# Altium PCB ConnectorBoard.PcbDoc
Units mm, origin at the board's own origin, x right, y up, seen from the top; angles counter-clockwise.
Board outline 50 x 20 mm, 2 copper layers (Top, Bottom); 14 components, 16 nets, 57 pads, 1 vias.
Unrouted connection lines stored in the file: 7.
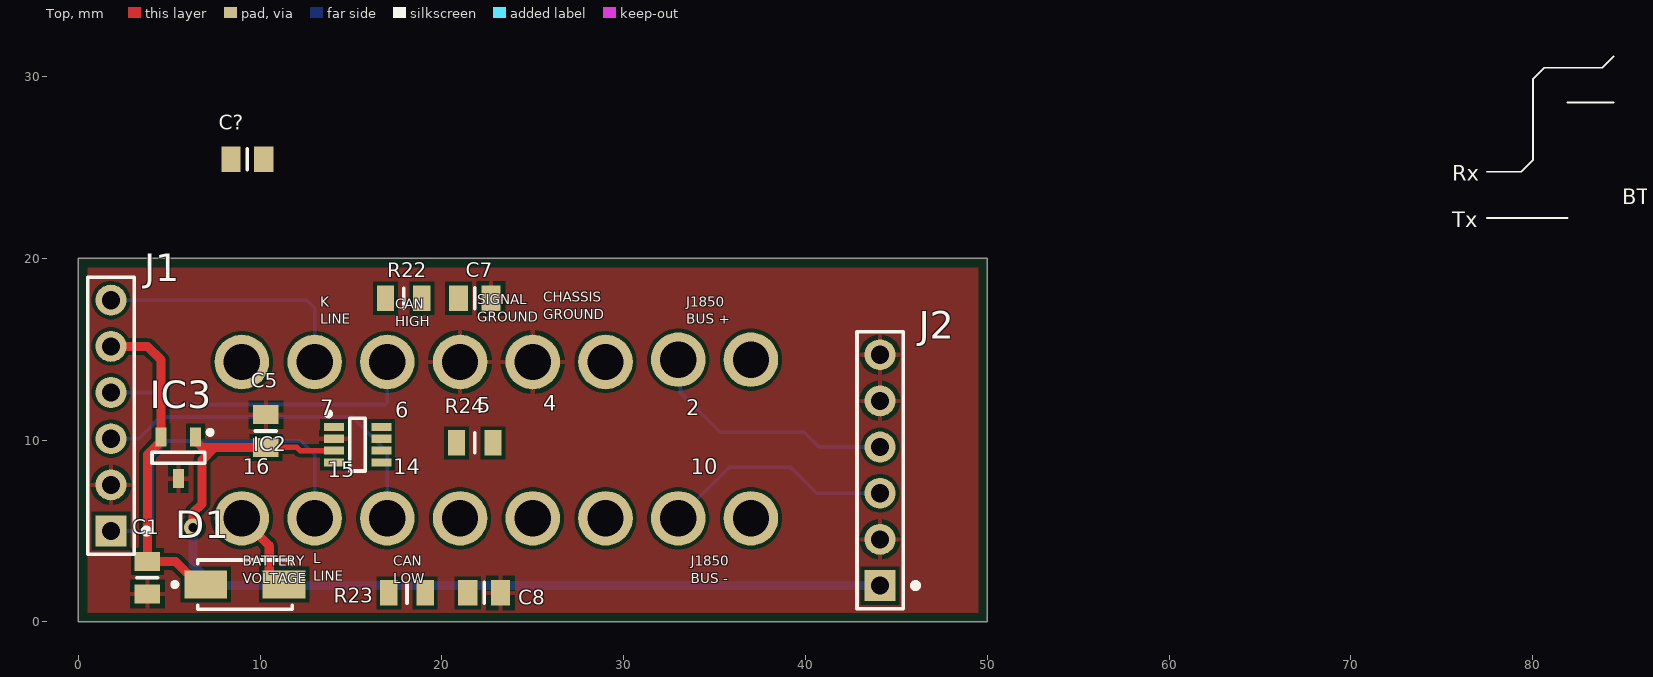
[diagram p0: Top view]
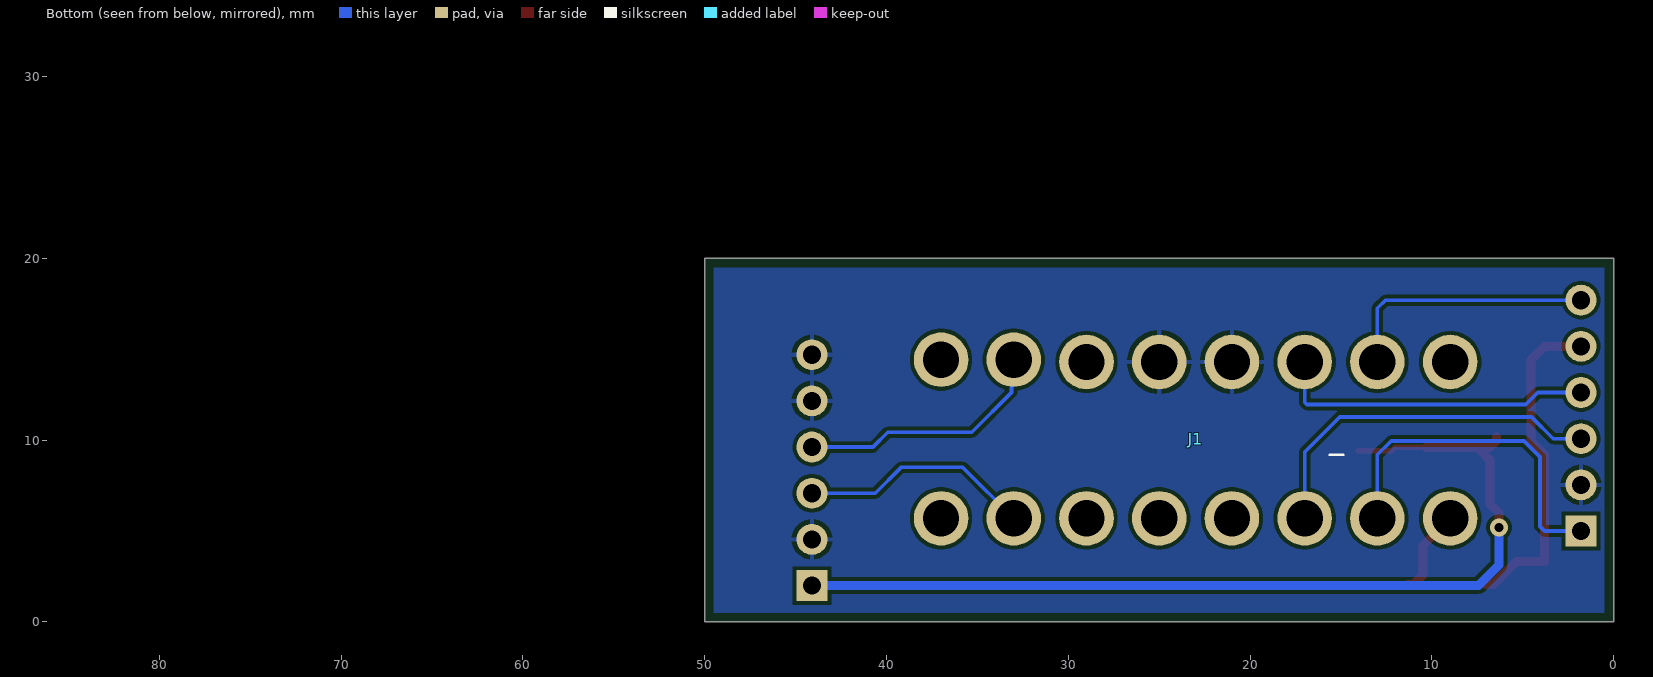
[diagram p1: Bottom view, seen from below]

## Layer stack, top to bottom
Top Solder: solder mask 0.0102, Solder Resist, Dk 3.5
Top: signal copper 0.035
Dielectric 1: dielectric 0.32, FR-4, Dk 4.8
Bottom: signal copper 0.035
Bottom Solder: solder mask 0.0102, Solder Resist, Dk 3.5

## Board outline
50,20 50,0 0,0 0,20

## Design rules (kind name [scope] priority, off if disabled: settings)
BoardOutlineClearance mdCopperDimension [All] p1: gap=0.254 ignorepadtopadclearanceinfootprint=FALSE except(0: Arc-SplitContinuation Track-SplitContinuation SMDPad-SplitContinuation THPad-SplitContinuation Via-SplitContinuation Fill-SplitContinuation Poly-SplitContinuation Region-SplitContinuation Text-SplitContinuation; 0.5: Poly-OutlineEdge Poly-CavityEdge Poly-CutoutEdge Poly-SplitBarrior)
Clearance Clearance_for_PolygonClass_Isolate_19,69 [InPolygonClass('Isolate_19,69') vs IsArc Or IsTrack Or IsPad Or IsVia Or IsFill Or IsRegion Or IsText] p1: gap=0.2 ignorepadtopadclearanceinfootprint=FALSE
Clearance "Clearance (Same Net)" [All] p2: gap=0.2 ignorepadtopadclearanceinfootprint=FALSE
Clearance [All] p3: gap=0.2 ignorepadtopadclearanceinfootprint=FALSE
ComponentClearance [All] p1: gap=0 collisioncheckmode=3 verticalgap=2540 showdistances=FALSE
Height [All] p1: minheight=0 maxheight=30 prefheight=10
HoleSize [All] p1: absolutevalues=TRUE maxlimit=2540 minlimit=0.5 maxpercent=80.000 minpercent=20.000
HoleToHoleClearance mdDrill [All] p1: gap=0.5 allowstackedmicrovias=TRUE
MinimumSolderMaskSliver [All] p1 off: minsoldermaskwidth=0.254
PasteMaskExpansion mlMinCreamFrame [All] p1: expansion=0
PolygonConnect PolygonConnect_For_PolygonThermal_ON_Width0_Gap196850 [InPolygonClass('PolygonThermal_ON_Width0_Gap196850') vs Not IsVia] p1: connectstyle=Relief reliefconductorwidth=0 reliefentries=4 polygonreliefangle="90 Angle" airgapwidth=0.5
PolygonConnect PolygonConnect_For_PolygonThermal_ON_Width196900_Gap196850 [InPolygonClass('PolygonThermal_ON_Width196900_Gap196850') vs Not IsVia] p2: connectstyle=Relief reliefconductorwidth=0.5 reliefentries=4 polygonreliefangle="90 Angle" airgapwidth=0.5
PolygonConnect ThermalVias [IsVia] p3: connectstyle=Direct reliefconductorwidth=0.254 reliefentries=4 polygonreliefangle="90 Angle" airgapwidth=0.254
PolygonConnect [All] p4: connectstyle=Relief reliefconductorwidth=0.254 reliefentries=4 polygonreliefangle="90 Angle" airgapwidth=0.254
RoutingVias [All] p1: holewidth=0.5 width=1 viastyle="Through Hole" minholewidth=0.5 minwidth=1 maxholewidth=2.54 maxwidth=2.54
SolderMaskExpansion mlMinStopFrame [All] p1: expansion=0.05 istentingtop=FALSE
SupplyNets "Schematic Supply Nets_2" [InNet('+5V')] p1: voltage=0.000
SupplyNets "Schematic Supply Nets_1" [InNet('+12V')] p2: voltage=0.000
SupplyNets "Schematic Supply Nets" [InNet('GND')] p3: voltage=0.000
Width [All] p1: maxlimit=0.5 minlimit=0.1 preferedwidth=0.2
24 further rules are at their usual default settings.

## Classes and differential pairs
component class ConnectorBoard: C1 C5 C7 C8 C? D1 IC2 IC3 J1 J2 R22 R23 R24

## Components (designator, comment, footprint, x,y, rotation, side; value= is the part's Value field where it differs from the comment)
C1 "100nF" CAPC2012X135N 3.803,2.434 r90 top
C5 "100nF" CAPC2012X135N 10.32,10.5 r270 top
C7 "560p" CAPC2012X135N 21.805,17.8 r180 top
C8 "560p" CAPC2012X135N 22.32,1.596 r180 top
C? "100nF" CAPC2012X135N 9.3,25.45 r0 top
D1 "S1A" DIOM5227X270N 9.167,2.059 r0 top
IC2 "TCAN332GDCNT" SOT65P280X145-8N 15.365,9.75 r0 top
IC3 "LM3480IM3-3.3/NOPB" SOT95P237X112-3N 5.503,9.03 r270 top
J1 "Socket 6" 3M_929974-01-06-RK 1.8,5 r90 top
J1 "" J1962_OBD_CONNECTOR 23,10 r180 bottom
J2 "Socket 6" 3M_929974-01-06-RK 44.1,2 r90 top
R22 "100" RESC2012X60N 17.9,17.8 r180 top
R23 "100" RESC2012X60N 18.084,1.596 r180 top
R24 "4k7" RESC2012X60N 21.805,9.85 r0 top

## Footprints (in the part's own frame and the unit in brackets; to place one, negate y for a bottom-side part, rotate by r counter-clockwise, add the part's x,y. Pads: shape width x height; smd on the part's side, far side on the other; paste and mask are expansions set on the pad)
3M_929974-01-06-RK [mm] "6 Contacts, Straight .100\" x .100\" Boardmount Socket, 929 Series"
  rect 1.7x1.7 hole 1: 1(0,0)
  round 1.7 hole 1: 2(2.54,0) 3(5.08,0) 4(7.62,0) 5(10.16,0) 6(12.7,0)
  silkscreen extent -1.27,-2.1 13.97,1.27, body extent -1.27,-1.27 13.97,1.27, height 8.25
CAPC2012X135N [mm] "Chip Capacitor, Body 2.0x1.25mm, IPC Medium Density"
  rect 1.05x1.4 smd: 1(-0.9,0) 2(0.9,0)
  silkscreen extent 0,-0.58 0,0.58, body extent -1.05,-0.67 1.05,0.68, height 1.25
DIOM5227X270N [mm] "DO-214-AC/SMA Diode, Molded Body;5.20mm L X 2.725mm W X 2.70mm H, IPC Medium Density"
  rect 2.35x1.55 smd: 1(-2.15,0) 2(2.15,0)
  silkscreen extent -3.97,-1.35 2.6,1.35, body extent -2.6,-1.3 2.6,1.31, height 2.7
J1962_OBD_CONNECTOR [mm] "J1962_OBD_PADS_ALL_HOLES"
  round 3 / inner round 0 / far side round 3 hole 2: 1(-14,4.427) 2(-10,4.427) 3(-6,4.3) 4(-2,4.3) 5(2,4.3) 6(6,4.3) 7(10,4.3) 8(14,4.3) 9(-14,-4.3) 10(-10,-4.3) 11(-6,-4.3) 12(-2,-4.3) 13(2,-4.3) 14(6,-4.3) 15(10,-4.3) 16(14,-4.3)
  body extent -20.21,-8.59 20.31,9.97, height 22.2
RESC2012X60N [mm] "Chip Resistor, EIA 0805, Metric 2012, Body 2.0x1.2mm, IPC Medium Density"
  rect 0.95x1.4 smd: 1(-1,0) 2(1,0)
  silkscreen extent 0,-0.55 0,0.55, body extent -1.1,-0.67 1.1,0.68, height 0.6
SOT65P280X145-8N [mm] "SOT, 0.65mm pitch; 8 pin, 1.625mm W X 2.90mm L X 1.45mm H body, IPC Medium Density"
  rect 1.1x0.45 smd: 1(-1.3,0.975) 2(-1.3,0.325) 3(-1.3,-0.325) 4(-1.3,-0.975) 5(1.3,-0.975) 6(1.3,-0.325) 7(1.3,0.325) 8(1.3,0.975)
  silkscreen extent -1.72,-1.45 0.43,1.82, body extent -1.51,-1.45 1.51,1.45, height 1.2
SOT95P237X112-3N [mm] "SOT, 0.95mm, pitch; 3 pin,1.30mm W X 2.92mm L X 1.12mm H body, IPC Medium Density"
  rect 1.05x0.6 smd: 1(-1.15,0.95) 2(-1.15,-0.95) 3(1.15,0)
  silkscreen extent -1.52,-1.45 0.3,1.88, body extent -1.25,-1.5 1.25,1.5, height 1.1

## Part data
C1 C5 C7 C8 C?: library part CC0805_100NF_50V_10%_X7R, "Non-polarised capacitor", Case=0805, Manufacturer=GENERIC, Manufacturer1 ComponentHeight=1mm, Manufacturer1 Example=TDK, Manufacturer1 Part Number=C2012X7R1H104K085, Tolerance=±10%, Voltage=50V, Author="CERN DEM JLC", Component Type=Standard, CreateDate=03.12.2007, HelpURL=\\cern.ch\dfs\Applications\Altium\Datasheets\CC0805_X7R_TDK_C.pdf, LatestRevisionDate=22.04.2015, Manufacturer Part Number=CC0805_100NF_50V_10%_X7R, Mounted=Yes, Part Description="SMD Multilayer Chip Ceramic Capacitor", Part Number=CC0805_100NF_50V_10%_X7R, Pin Count=2, Sense=No, SMD=Yes, Socket=No, Status=Preferred, TC=X7R
D1: "Diode", Case=DO-214AC, Manufacturer="FAIRCHILD SEMICONDUCTOR", Power=1A, Voltage=50V, Author="CERN DEM JLC", Bonding=No, Component Type=Standard, ComponentHeight=2.70mm, CreateDate=10.05.2010, Device=S1A, HelpURL=\\cern.ch\dfs\Applications\Altium\Datasheets\S1A.pdf, LatestRevisionDate=13.06.2012, Manufacturer Part Number=S1A, Mounted=Yes, PackageDescription="DO-214-AC/SMA Diode, Molded Body; 5.20mm L X 2.725mm W X 2.70mm H, IPC Medium Density", Part Description="Surface Mount Glass Passivated Rectifier", Part Number=S1A, Pin Count=2, PressFit=No, Sense=No, SMD=Yes, Socket=No
IC2: "3.3V CAN Transceivers with CAN FD (Flexible Data Rate)", Case=SOT23-8, Manufacturer="TEXAS INSTRUMENTS", Author="CERN DEM JLC", Bonding=No, Component Type=Standard, ComponentHeight=1.45mm, CreateDate=22.08.2017, Device=TCAN332GDCNT, HelpURL=\\cern.ch\dfs\Applications\Altium\Datasheets\TCAN332GDCNT.pdf, LatestRevisionDate=22.08.2017, Manufacturer Part Number=TCAN332GDCNT, Mounted=Yes, PackageDescription="SOT, 0.65mm Pitch; 8 pin, 1.625mm W X 2.90mm L X 1.45mm H body, IPC Medium Density", Part Description="3.3V CAN Transceivers with CAN FD (Flexible Data Rate)", Part Number=TCAN332GDCNT, Pin Count=8, PressFit=No, Sense=No, SMD=Yes, Socket=No
IC3: "3-Terminal Regulator 1=OUT 2=IN 3=GND", Case=SOT23-3, Manufacturer="TEXAS INSTRUMENTS", Author="CERN DEM JLC", Bonding=No, Component Type=Standard, ComponentHeight=1.12mm, CreateDate=04.12.2013, Device=LM3480IM3-3.3/NOPB, HelpURL=\\cern.ch\dfs\Applications\Altium\Datasheets\LM3480IM3-3.3-NOPB.pdf, LatestRevisionDate=04.12.2013, Manufacturer Part Number=LM3480IM3-3.3/NOPB, Mounted=Yes, PackageDescription="SOT, 0.95mm, pitch; 3 pin,1.30mm W X 2.92mm L X 1.12mm H body, IPC Medium Density", Part Description="3.3V, 100 mA Quasi Low-Dropout Linear Voltage Regulator", Part Number=LM3480IM3-3.3/NOPB, Pin Count=3, PressFit=No, Sense=No, SMD=Yes, Socket=No
J1 J2: library part 3M_929974-01-06-RK, "Connector 6 Female", Manufacturer=3M, Manufacturer Part Number=929974-01-06-RK, Author="CERN DEM JMW", Component Type=Standard, ComponentHeight=8.26mm, CreateDate=31.08.2016, Family="Socket 6", HelpURL=\\cern.ch\dfs\Applications\Altium\Datasheets\3M_929974-01-06-RK.pdf, LatestRevisionDate=31.08.2016, Mounted=Yes, Part Description="6 Contacts, Straight .100\" x .100\" Boardmount Socket, 929 Series", Part Number=3M_929974-01-06-RK, Pin Count=6, PressFit=No, Sense=No, SMD=No, Socket=No, Status=None
J1: library part J1962_OBD_CONNECTOR, Batteryvoltage="Battery voltage", CAN-High=CAN-High, CAN-Low=CAN-Low, Chassisground="Chassis ground", DeviceName=ALL_HOLES, DeviceSetName=J1962_OBD_PADS_?, GateName_1=G$1, K-Line=K-Line, L-Line=L-Line, LibraryName=J1962, Signalground="Signal ground", SymbolName_1=J1962_OBD_ONLY
R22 R23: library part R0805_2K2_1%_0.125W_100PPM, "Resistor - 1%", Case=0805, Manufacturer=GENERIC, Manufacturer1 ComponentHeight=0.6mm, Manufacturer1 Example="NIC COMPONENT", Manufacturer1 Part Number=NRC10F2201TRF, Power=0.125W, Tolerance=±1%, Author="CERN DEM JLC", Component Type=Standard, CreateDate=03.12.2007, HelpURL=\\cern.ch\dfs\Applications\Altium\Datasheets\R0805_NIC_NRC.pdf, LatestRevisionDate=13.03.2008, Manufacturer Part Number=R0805_2K2_1%_0.125W_100PPM, Mounted=Yes, Part Description="General Purpose Thick Film Chip Resistor", Part Number=R0805_2K2_1%_0.125W_100PPM, Pin Count=2, PressFit=No, Sense=No, SMD=Yes, Socket=No, Status=Preferred, TC=±100ppm/°C
R24: library part R0805_4K7_1%_0.125W_100PPM, "Resistor - 1%", Case=0805, Manufacturer=GENERIC, Manufacturer1 ComponentHeight=0.6mm, Manufacturer1 Example="NIC COMPONENT", Manufacturer1 Part Number=NRC10F4701TRF, Power=0.125W, Tolerance=±1%, Author="CERN DEM JLC", Component Type=Standard, CreateDate=03.12.2007, HelpURL=\\cern.ch\dfs\Applications\Altium\Datasheets\R0805_NIC_NRC.pdf, LatestRevisionDate=13.03.2008, Manufacturer Part Number=R0805_4K7_1%_0.125W_100PPM, Mounted=Yes, Part Description="General Purpose Thick Film Chip Resistor", Part Number=R0805_4K7_1%_0.125W_100PPM, Pin Count=2, PressFit=No, Sense=No, SMD=Yes, Socket=No, Status=Preferred, TC=±100ppm/°C

## Via types
v1: diameter 1, hole 0.5, Top to Bottom, 1 vias

## Nets (pads, with @x,y where several pads share a name; then routed paths per layer and width w, separated by ;. In a path a pad name is that pad's centre, name@x,y a point inside that pad or via, vN(x,y) a via of type N, cw(c..) or ccw(c..) an arc to the next point about the centre after c; other vN are vias at no path point)
+5V: C5.2 IC2.3 IC3.1 J2.1 | length 53.3
  Top w0.3: C5.2 12.02,9.6 12.195,9.425 IC2.3
  Top w0.5: v1(6.304,5.204) 6.304,6.007 6.808,6.511 6.808,8.908 7.5,9.6 ; IC3.1 6.453,9.955 6.808,9.6 7.5,9.6 ; C5.2 7.5,9.6
  Bottom w0.5: v1(6.304,5.204) 6.304,3.142 7.445,2 J2.1
+12V: C1.2 D1.1 IC3.2 J1.5@1.8,15.16 | length 18.2
  Top w0.5: J1.5@1.8,15.16 3.803,15.16 4.553,14.41 IC3.2 4.553,9.955 3.803,9.205 C1.2 5.342,3.334 6.617,2.059 D1.1
CAN-H: IC2.7 J1.4@1.8,12.62 J1.6@17,14.3 R22.2 | length 17.7
  Bottom w0.2: J1.4@1.8,12.62 4.18,12.62 4.841,11.959 16.883,11.959 17,12.076 J1.6@17,14.3
CAN-L: IC2.6 J1.3@1.8,10.08 J1.14 R23.2 | length 20.1
  Bottom w0.2: J1.3@1.8,10.08 3.334,10.08 4.527,11.273 15.077,11.273 17,9.35 J1.14
CANRx: IC2.4
CANTx: IC2.1
GND: C1.1 C5.1 C7.1 C8.1 IC2.2 IC3.3 J1.2@1.8,7.54 J1.4@25,14.3 J1.5@21,14.3 J2.2 J2.5 J2.6
ISO-K: J1.6@1.8,17.7 J1.7 | length 14.3
  Bottom w0.2: J1.6@1.8,17.7 12.55,17.7 13,17.25 J1.7
ISO-L: J1.1@1.8,5 J1.15 | length 19.3
  Bottom w0.2: J1.1@1.8,5 3.803,5 4.053,5.25 4.053,9.075 4.935,9.957 12.243,9.957 13,9.2 J1.15
J1850+: J1.2@33,14.427 J2.4 | length 14.1
  Bottom w0.2: J1.2@33,14.427 33.123,14.304 33.123,12.627 35.315,10.435 39.932,10.435 40.747,9.62 J2.4
J1850-: J1.10 J2.3 | length 12.8
  Bottom w0.2: J1.10 35.8,8.5 39.2,8.5 40.62,7.08 J2.3
NetC7_2: C7.2 R22.1
NetC8_2: C8.2 R23.1
NetIC2_8: IC2.8 R24.1
PwrCtrl/Busy: R24.2
VBAT: D1.2 J1.16 | length 4.8
  Top w0.5: J1.16 10.507,4.194 10.507,2.584 11.032,2.059 D1.2
pads on no net: C?.1 C?.2 IC2.5 J1.1@37,14.427 J1.3@29,14.3 J1.8 J1.9 J1.11 J1.12 J1.13

## Polygon pours and split planes (outlines as drawn)
GND on Top "GND_L01_P019" (solid, pour order 19): 0,0 0,20 50,20 50,0
GND on Bottom "GND_L02_P018" (solid, pour order 18): 0,0 0,20 50,20 50,0

## Silkscreen, mask and mechanical layers (free items; w line width, h text height)
Top Overlay:
  lines w0.1: 77.47,22.225 81.915,22.225 ; 77.47,24.765 79.375,24.765 80.01,25.4 80.01,29.845 80.645,30.48 83.82,30.48 84.455,31.115 ; 81.915,28.575 84.455,28.575
  text "FACTORY" at 78.998,59.613 h0.85
  text "RESET" at 79.847,58.113 h0.85
  text "Tx" at 97.03,48.102 h0.85 r90
  text "OBD" at 97.03,44.502 h0.85 r90
  text "Rx" at 97.03,41.752 h0.85 r90
  text "n/c" at 87.991,38.374 h0.85 r45
  text "+5V" at 87.991,35.834 h0.85 r45
  text "Tx" at 97.03,35.402 h0.85 r90
  text "GND" at 87.991,33.294 h0.85 r45
  text "BT" at 97.03,32.227 h0.85 r90
  text "Tx" at 87.991,30.754 h0.85 r45
  text "Rx" at 97.03,29.052 h0.85 r90
  text "Rx" at 87.991,28.214 h0.85 r45
  text "n/c" at 87.991,25.674 h0.85 r45
  text "Rx" at 75.565,24.255 h0.85
  text "BT" at 84.932,22.985 h0.85
  text "Tx" at 75.565,21.715 h0.85
  text "ENABLE" at 90.217,18.973 h0.85
  text "LEDS" at 91.067,17.473 h0.85
Bottom Overlay:
  region: 15.635,9.265 15.635,9.255 14.865,9.255 14.865,9.265
  region: 15.655,9.255 15.655,9.245 14.845,9.245 14.845,9.255
  region: 15.655,9.245 15.655,9.235 14.845,9.235 14.845,9.245
  region: 15.665,9.235 15.665,9.225 14.835,9.225 14.835,9.235
  region: 15.665,9.225 15.665,9.215 14.835,9.215 14.835,9.225
  region: 15.665,9.215 15.665,9.205 14.835,9.205 14.835,9.215
  region: 15.665,9.205 15.665,9.195 14.835,9.195 14.835,9.205
  region: 15.665,9.195 15.665,9.185 14.835,9.185 14.835,9.195
  region: 15.675,9.185 15.675,9.175 14.825,9.175 14.825,9.185
  region: 15.675,9.175 15.675,9.165 14.825,9.165 14.825,9.175
  region: 15.675,9.165 15.675,9.155 14.825,9.155 14.825,9.165
  region: 15.675,9.155 15.675,9.145 14.825,9.145 14.825,9.155

## Text inside footprints (layer, text, board x,y; h text height)
J1: Top Overlay "BUS +" at 33.447,16.397 h0.54; Top Overlay "J1850" at 33.447,17.349 h0.54; Top Overlay "GROUND" at 25.572,16.651 h0.54; Top Overlay "CHASSIS" at 25.572,17.603 h0.54; Top Overlay "SIGNAL" at 21.952,17.476 h0.54; Top Overlay "GROUND" at 21.952,16.524 h0.54; Top Overlay "CAN" at 17.443,17.222 h0.54; Top Overlay "HIGH" at 17.443,16.27 h0.54; Top Overlay "K" at 13.315,17.349 h0.54; Top Overlay "LINE" at 13.315,16.397 h0.54; Top Overlay "2" at 33.447,11.373 h0.85; Top Overlay "4" at 25.572,11.627 h0.85; Top Overlay "5" at 21.952,11.5 h0.85; Top Overlay "6" at 17.443,11.246 h0.85; Top Overlay "7" at 13.315,11.373 h0.85; Top Overlay "14" at 17.316,8.119 h0.85; Top Overlay "15" at 13.729,7.968 h0.85; Top Overlay "16" at 9.06,8.119 h0.85; Top Overlay "J1850" at 33.701,3.095 h0.54; Top Overlay "BUS -" at 33.701,2.143 h0.54; Top Overlay "LOW" at 17.316,2.143 h0.54; Top Overlay "CAN" at 17.316,3.095 h0.54; Top Overlay "L" at 12.934,3.222 h0.54; Top Overlay "LINE" at 12.934,2.27 h0.54; Top Overlay "VOLTAGE" at 9.06,2.143 h0.54; Top Overlay "BATTERY" at 9.06,3.095 h0.54; Top Overlay "10" at 33.701,8.119 h0.85